# Altium PCB PCB_hand washing machine.pcbdoc
Units mm, origin at the board's own origin, x right, y up, seen from the top; angles counter-clockwise.
Board outline 80.77 x 61.9 mm, 2 copper layers (Top Layer, Bottom Layer); 16 components, 13 nets, 49 pads, 0 vias.
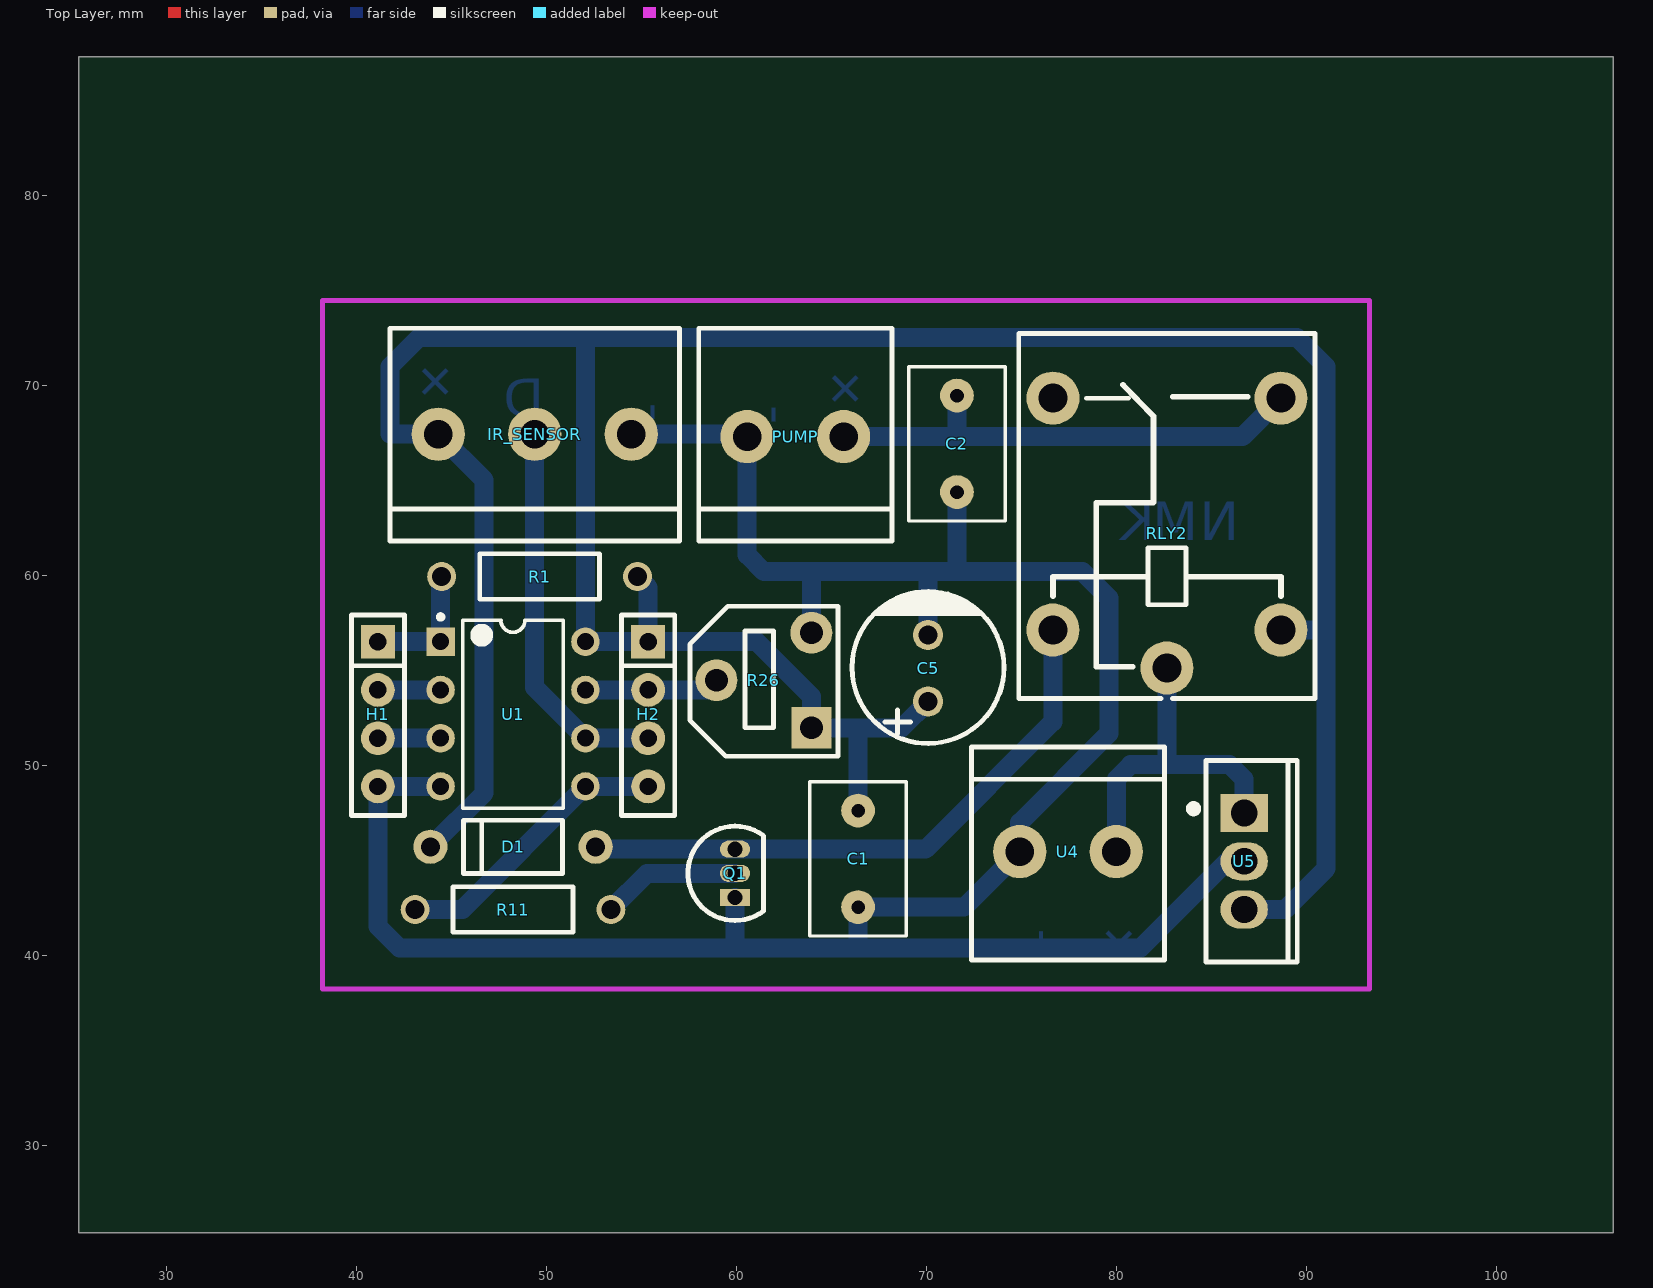
[diagram p0: Top Layer view]
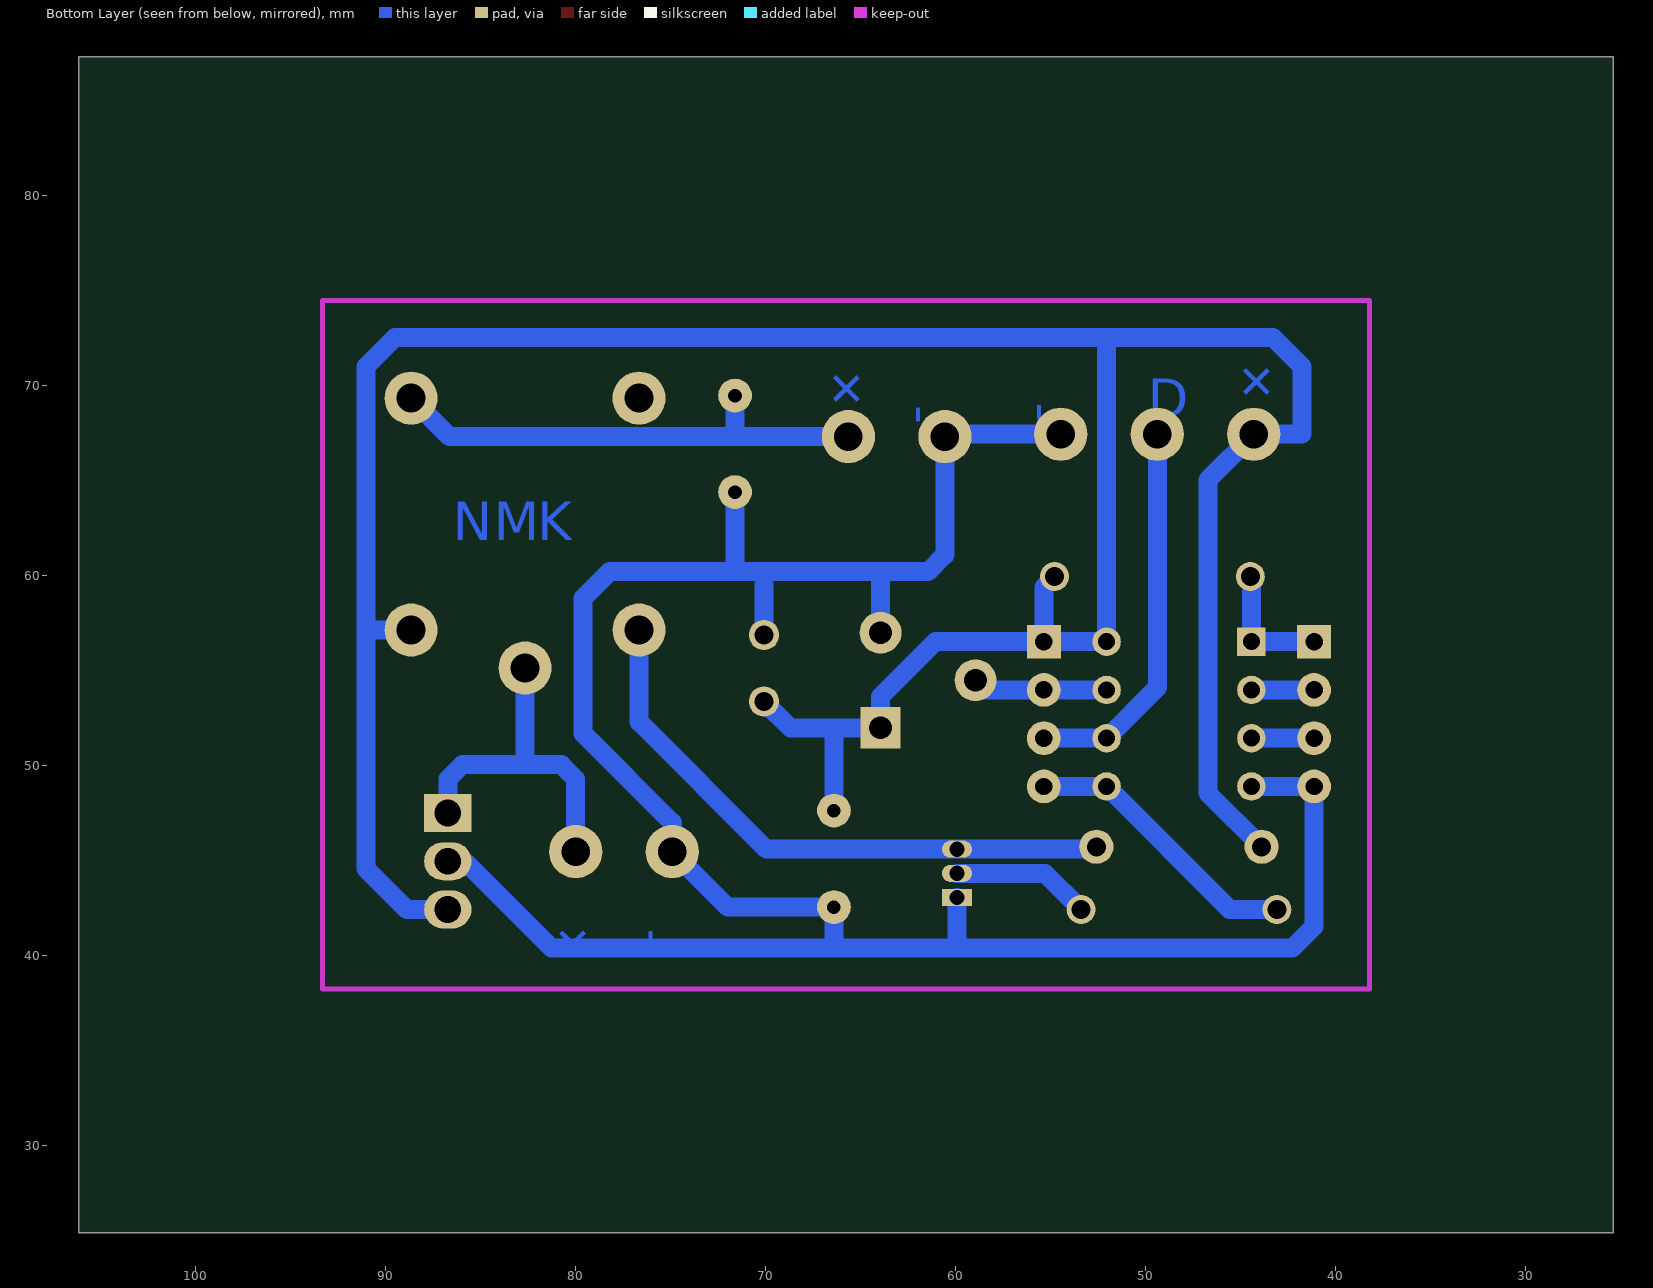
[diagram p1: Bottom Layer view, seen from below]

## Layer stack, top to bottom
Top Layer: signal copper (thickness not stored)
Dielectric: dielectric 0.32, FR-4, Dk 4.8
Bottom Layer: signal copper (thickness not stored)

## Board outline
106.172,25.4 25.4,25.4 25.4,87.305 106.172,87.305

## Components (designator, comment, footprint, x,y, rotation, side; value= is the part's Value field where it differs from the comment)
C1 "100nF" RAD-0.2 66.421,45.085 r90 top
C2 "100nF" RAD-0.2 71.628,66.929 r90 top
C5 "220uF" CAP-TH_BD8.0-P3.50-D1.0-FD 70.104,55.118 r90 top
D1 "1N4004" DO-41_BD2.4-L4.7-P8.70-D0.9-FD 48.26,45.72 r180 top
H1 "HEADER 4P 2.54MM" "HEADER 4P 2.54MM" 41.148,51.435 r0 top
H2 "HEADER 4P 2.54MM" "HEADER 4P 2.54MM" 55.372,51.435 r0 top
IR_SENSOR "Terminal 5.08 3P" PRINTKLEMME_5.08_3P 54.483,67.437 r180 top
PUMP "Terminal 5.08 2P" PRINTKLEMME_5.08_2P 65.659,67.31 r180 top
Q1 "2N5551_C147849" TO-92-3_L4.9-W3.7-P1.27-L 59.944,44.323 r90 top
R1 "1K" RES-TH_BD2.4-L6.3-P10.30-D0.6 49.657,59.944 r180 top
R11 "220" RES-TH_BD2.4-L6.3-P10.30-D0.6 48.26,42.418 r0 top
R26 "1K" RES-ADJ-SMD_RM065-V1 61.468,54.483 r90 top
RLY2 "SRD-05VDC-SL-C" RELAY-TH_SRD-XXVDC-XL-C 82.677,62.23 r90 top
U1 "ATTINY13A-PU" DIP-8_L9.8-W6.6-P2.54-LS7.6-BL 48.26,52.705 r270 top
U4 "Terminal 5.08 2P" PRINTKLEMME_5.08_2P 74.93,45.466 r0 top
U5 "7805" TO-220-3_L10.0-W4.5-P2.54-L 86.741,44.958 r270 top

## Footprints (in the part's own frame and the unit in brackets; to place one, negate y for a bottom-side part, rotate by r counter-clockwise, add the part's x,y. Pads: shape width x height; smd on the part's side, far side on the other; paste and mask are expansions set on the pad)
CAP-TH_BD8.0-P3.50-D1.0-FD [mm]
  round 1.6 hole 1: 1(-1.75,0) 2(1.75,0)
  silkscreen extent -3.96,-4 4.04,4
DIP-8_L9.8-W6.6-P2.54-LS7.6-BL [mm]
  rect 1.5x1.5 hole 0.9: 1(-3.81,-3.81)
  round 1.5 hole 0.9: 2(-1.27,-3.81) 3(1.27,-3.81) 4(3.81,-3.81) 5(3.81,3.81) 6(1.27,3.81) 7(-1.27,3.81) 8(-3.81,3.81)
  silkscreen extent -5.23,-3.93 4.96,2.65
DO-41_BD2.4-L4.7-P8.70-D0.9-FD [mm]
  round 1.8 hole 1: 1(-4.35,0) 2(4.35,0)
  silkscreen extent -2.6,-1.4 2.6,1.4
"HEADER 4P 2.54MM" [mil]
  rect 70x70 hole 36: 1(0,200)
  round 70 hole 36: 2(0,100) 3(0,0) 4(0,-100)
  silkscreen extent -55,-160 55,255
PRINTKLEMME_5.08_2P [mm]
  round 2.8 hole 1.5: 1(5.08,0) 2(0,0)
  silkscreen extent -2.54,-5.7 7.62,5.5
PRINTKLEMME_5.08_3P [mm]
  round 2.8 hole 1.5: 1(10.16,0) 2(5.08,0) 3(0,0)
  silkscreen extent -2.54,-5.57 12.7,5.63
RAD-0.2 [mil]
  round 70 hole 28: 1(100,0) 2(-100,0)
  silkscreen extent -160,-100 160,100
RELAY-TH_SRD-XXVDC-XL-C [mil]
  round 110 hole 60: 1(-200.79,-236.22) 2(279.53,-236.2) 3(279.53,236.2) 4(-200.79,236.22) 5(-279.53,0)
  silkscreen extent -342,-307 413,307
RES-ADJ-SMD_RM065-V1 [mm]
  rect 2.2x2.1 hole 1.199: 1(-2.499,-2.5)
  round 2.2 hole 1.199: 2(0,2.5) 3(2.499,-2.499)
  silkscreen extent -4,-3.9 3.9,3.9
RES-TH_BD2.4-L6.3-P10.30-D0.6 [mm]
  round 1.524 hole 1: 1(-5.15,0) 2(5.15,0)
  silkscreen extent -3.15,-1.2 3.15,1.2
TO-92-3_L4.9-W3.7-P1.27-L [mm]
  rect 0.9x1.6 hole 0.8: 1(-1.27,0)
  oval 0.9x1.6 hole 0.8: 2(0,0) 3(1.27,0)
  silkscreen extent -2.48,-1.5 2.48,2.48
TO-220-3_L10.0-W4.5-P2.54-L [mm]
  rect 2x2.5 hole 1.4: 1(-2.54,0)
  oval 2x2.5 hole 1.4: 2(0,0) 3(2.54,0)
  silkscreen extent -5.3,-2.86 5.3,2.8

## Nets (pads, with @x,y where several pads share a name; then routed paths per layer and width w, separated by ;. In a path a pad name is that pad's centre, name@x,y a point inside that pad or via, vN(x,y) a via of type N, cw(c..) or ccw(c..) an arc to the next point about the centre after c; other vN are vias at no path point)
12V: RLY2.5 U4.1 U5.1 | length 24.2
  Bottom Layer w1: U4.1 80.01,49.276 80.772,50.038 85.979,50.038 ; RLY2.5 82.677,50.038 85.979,50.038 ; 85.979,50.038 86.741,49.276 ; 85.979,50.038 86.741,49.276 ; 86.741,49.276 U5.1 86.741,49.276
D1_1: D1.1 Q1.3 RLY2.4 | length 31.7
  Bottom Layer w1: D1.1 52.737,45.593 Q1.3 69.977,45.593 76.678,52.294 RLY2.4
GND: C1.2 C2.2 C5.2 H1.4 IR_SENSOR.3 PUMP.1 Q1.1 R26.3 U1.4 U4.2 U5.2 | length 147.8
  Bottom Layer w1: U1.4 H1.4 41.148,41.529 42.291,40.386 59.944,40.386 ; IR_SENSOR.3 60.452,67.437 PUMP.1 60.579,61.087 61.468,60.198 63.967,60.198 ; C2.2 71.628,60.198 70.104,60.198 ; U5.2 85.852,44.958 81.28,40.386 66.421,40.386 ; 59.944,40.386 Q1.1 59.944,40.386 ; 59.944,40.386 66.421,40.386 ; 63.967,60.198 R26.3 63.967,60.198 ; 63.967,60.198 70.104,60.198 ; 66.421,40.386 C1.2 ; 66.421,40.386 C1.2 ; C1.2 72.009,42.545 U4.2 74.93,46.99 79.629,51.689 79.629,58.801 78.232,60.198 70.104,60.198 ; C5.2 70.104,60.198 ; C5.2 70.104,60.198 ; C5.2 70.104,60.198
PB0: H2.4 R11.1 U1.5 | length 14.9
  Bottom Layer w1: R11.1 45.593,42.418 U1.5 H2.4
PB1: H2.3 IR_SENSOR.2 U1.6 | length 20.4
  Bottom Layer w1: IR_SENSOR.2 49.403,54.102 U1.6 H2.3
PB2: H2.2 R26.2 U1.7 | length 7.4
  Bottom Layer w1: U1.7 H2.2 58.968,53.975 R26.2
PB3: H1.2 U1.2 | length 3.3
  Bottom Layer w1: H1.2 U1.2
PB4: H1.3 U1.3 | length 3.3
  Bottom Layer w1: H1.3 U1.3
PB5: H1.1 R1.2 U1.1 | length 6.8
  Bottom Layer w1: H1.1 U1.1 44.45,59.887 R1.2
PUMP_2: C2.1 PUMP.2 RLY2.2 | length 32
  Bottom Layer w1: C2.1 71.628,67.31 PUMP.2 86.656,67.31 RLY2.2
Q1_2: Q1.2 R11.2 | length 7.3
  Bottom Layer w1: R11.2 55.315,44.323 Q1.2
RLY2_3: RLY2.3
VCC: C1.1 C5.1 D1.2 H2.1 IR_SENSOR.1 R1.1 R26.1 RLY2.1 U1.8 U5.3 | length 166.4
  Bottom Layer w1: D1.2 46.736,48.546 46.736,65.024 IR_SENSOR.1 41.783,67.437 41.783,70.993 43.307,72.517 52.07,72.517 U1.8 H2.1 ; 50.546,72.517 89.535,72.517 91.059,70.993 91.059,57.13 ; R1.1 55.372,59.379 H2.1 ; C1.1 66.421,51.984 R26.1 ; C5.1 68.72,51.984 R26.1 ; U5.3 88.9,42.418 91.059,44.577 91.059,57.13 ; H2.1 61.087,56.515 63.968,53.634 R26.1 ; 91.059,57.13 RLY2.1 91.059,57.13

## Other copper
Bottom Layer:
  text "-" at 56.388,69.088 h2.03 r90
  text "-" at 62.738,68.961 h2.03 r90
  text "+" at 44.367,68.751 h2.03 r315
  text "+" at 65.957,68.37 h2.03 r315
  text "D" at 49.911,68.326 h2.03
  text "K" at 82.042,61.849 h2.03
  text "M" at 84.328,61.849 h2.03
  text "N" at 86.487,61.849 h2.03
  text "-" at 76.835,41.402 h2.03 r90
  text "+" at 81.617,40.811 h2.03 r45